# Altium PCB MIC-SMD_6P-L3.8-W3.0-TL.pcbdoc
Units mm, origin at the board's own origin, x right, y up, seen from the top; angles counter-clockwise.
Board outline 15.96 x 16.76 mm, 2 copper layers (Top Layer, Bottom Layer); 1 components, 0 nets, 9 pads, 0 vias.
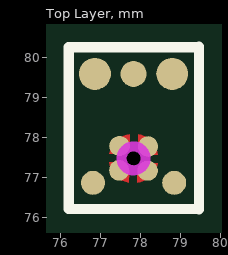
[diagram p0: Top Layer view]
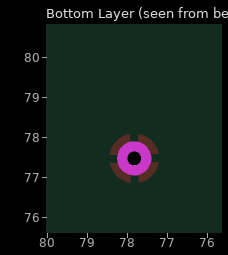
[diagram p1: Bottom Layer view, seen from below]

## Layer stack, top to bottom
Top Layer: signal copper (thickness not stored)
Dielectric: dielectric 0.32, FR-4, Dk 4.8
Bottom Layer: signal copper (thickness not stored)

## Board outline
85.807,69.85 69.85,69.85 69.85,86.614 85.807,86.614

## Components (designator, comment, footprint, x,y, rotation, side; value= is the part's Value field where it differs from the comment)
? "MIC-SMD_6P-L3.8-W3.0-TL" MIC-SMD_6P-L3.8-W3.0-TL 77.821,78.224 r0 top

## Footprints (in the part's own frame and the unit in brackets; to place one, negate y for a bottom-side part, rotate by r counter-clockwise, add the part's x,y. Pads: shape width x height; smd on the part's side, far side on the other; paste and mask are expansions set on the pad)
MIC-SMD_6P-L3.8-W3.0-TL [mm]
  round 0.8 smd: 1(-0.966,1.361) 4(0.966,1.361)
  round 0.6 smd: 2(-1.015,-1.361) 3(1.015,-1.361)
  round 0.65 smd: 5(0,1.361)
  oval 0.495x0.516 smd: 6(-0.361,-1.048) 6(0.362,-0.453)
  oval 0.516x0.495 smd: 6(-0.352,-0.439) 6(0.352,-1.061)
  Top Layer region: -0.345,-0.636 -0.609,-0.633 -0.589,-0.554 -0.542,-0.447 -0.479,-0.357 -0.407,-0.285 -0.335,-0.23 -0.251,-0.185 -0.171,-0.157 -0.095,-0.141 -0.094,-0.456 -0.146,-0.471 -0.194,-0.503 -0.257,-0.558 -0.279,-0.59 -0.297,-0.636
  Top Layer region: 0.114,-0.405 0.117,-0.141 0.196,-0.161 0.303,-0.208 0.394,-0.272 0.465,-0.343 0.521,-0.415 0.566,-0.499 0.593,-0.579 0.609,-0.655 0.295,-0.656 0.279,-0.605 0.248,-0.556 0.192,-0.494 0.16,-0.471 0.114,-0.453
  Top Layer region: -0.114,-1.095 -0.117,-1.36 -0.196,-1.339 -0.303,-1.292 -0.393,-1.229 -0.465,-1.157 -0.52,-1.085 -0.565,-1.001 -0.593,-0.921 -0.609,-0.845 -0.294,-0.844 -0.278,-0.896 -0.247,-0.945 -0.192,-1.007 -0.16,-1.029 -0.114,-1.047
  Top Layer region: 0.345,-0.864 0.61,-0.867 0.589,-0.946 0.542,-1.053 0.479,-1.143 0.407,-1.215 0.335,-1.27 0.251,-1.316 0.171,-1.343 0.095,-1.359 0.094,-1.045 0.146,-1.029 0.195,-0.998 0.257,-0.942 0.279,-0.91 0.297,-0.864
  Multi-Layer board cut-out: 0.3,-0.75 0.259,-0.602 0.149,-0.494 0,-0.454 -0.149,-0.494 -0.258,-0.602 -0.3,-0.75 -0.3,-0.75 -0.258,-0.898 -0.149,-1.007 0,-1.046 0.149,-1.007 0.259,-0.898 0.3,-0.75
  silkscreen extent -1.62,-2.02 1.64,2.04

## Nets (pads, with @x,y where several pads share a name; then routed paths per layer and width w, separated by ;. In a path a pad name is that pad's centre, name@x,y a point inside that pad or via, vN(x,y) a via of type N, cw(c..) or ccw(c..) an arc to the next point about the centre after c; other vN are vias at no path point)
pads on no net: ?.1 ?.2 ?.3 ?.4 ?.5 ?.6

## Keep-outs
Multi-Layer:
  circle w0.254: c77.821,77.474 r0.3